# EAGLE board OLED_Adapter_ein_Display2 (EAGLE 9.5.2)
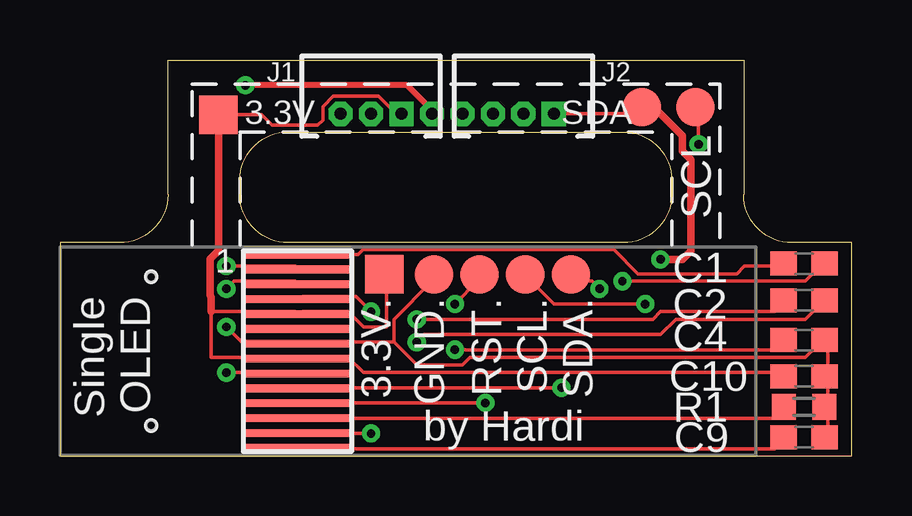
[diagram p0: board, top side]
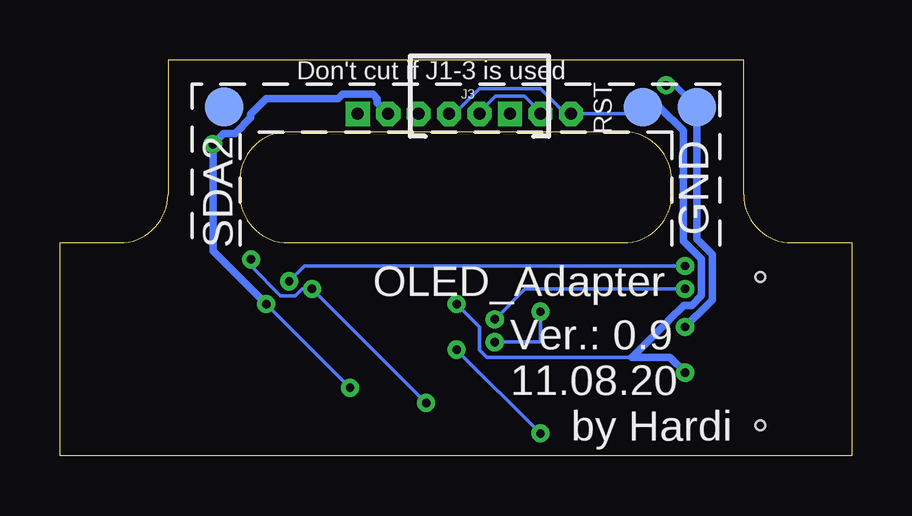
[diagram p1: board, bottom side, seen from below]

Size 33 x 16.5 mm. Coordinates in mm from the lower left corner, seen from the top.
Outline: 0,0 33,0 33,8.88 30.5,8.88 arc-90 28.5,10.88 28.5,16.5 4.5,16.5 4.5,10.88 arc-90 2.5,8.88 0,8.88 0,0
Outline: 23.5,8.88 9.5,8.88 arc-90 7.5,10.88 7.5,11.5 arc-90 9.5,13.5 23.5,13.5 arc-90 25.5,11.5 25.5,10.88 arc-90 23.5,8.88
Copper layers (1*16): Top 0.035mm / dielectric 1.5mm / Bottom 0.035mm
Design rules "default *": minimum track width 6mil, minimum drill 0.35mm, track to track 6mil, track to pad 6mil, pad to pad 6mil, via to via 6mil, smd to smd 6mil, copper to edge 8mil, drill to drill 6mil, minimum pad ring 10mil, minimum via ring 8mil, stop-mask expansion 4mil, vias tented up to drill 0mil, thermal gap 10mil

## Footprints (pad centres in the part's own frame; a part is rotated, then mirrored left to right if it is on the bottom)
TP16SQ = smd 1.6 x 1.6: TP 0,0
C0603 = smd 1.1 x 1: 1 -0.85,0; 2 0.85,0
TP16R = smd 1.6 x 1.6: TP 0,0
OLED_FLEX_W_DISP = smd 4.5 x 0.32: 1 0,0; 2 0,-0.62; 3 0,-1.24; 4 0,-1.86; 5 0,-2.48; 6 0,-3.1; 7 0,-3.72; 8 0,-4.34; 9 0,-4.96; 10 0,-5.58; 11 0,-6.2; 12 0,-6.82; 13 0,-7.44; 14 0,-8.06 | hole 0.4: -6.1,-0.93; -6.1,-7.13
MINI = drill 0.5 pad 1.016 square: 1 -1.27,0 | drill 0.5 pad 1.016 octagon: 2 0,0; 3 1.27,0
R0603 = smd 1 x 1.1: 1 -0.85,0; 2 0.85,0

## Placement (x,y rotation side)
3.3V  3.3V  [TP16SQ]  6.6,14.22 0 top
3.3V.  TPTP16SQ  [TP16SQ]  13.53,7.56 0 top
C1  470nF  [C0603]  31.02,8 180 top
C2  470nF  [C0603]  31.02,6.48 180 top
C4  2.2uF  [C0603]  31.02,4.83 180 top
C9  4.7uF  [C0603]  31.02,0.76 0 top
C10  4.7uF  [C0603]  31.02,3.3 0 top
GND  GND  [TP16R]  6.44,14.53 0 bottom
GND.  TPTP16R  [TP16R]  15.59,7.56 0 top
IC1  OLED_FLEXW_DISP  [OLED_FLEX_W_DISP]  9.91,8.38 0 top
J1  SV3  [MINI]  12.97,14.26 180 top
J2  SV3  [MINI]  19.32,14.26 180 top
J3  SV3  [MINI]  15.51,14.26 180 bottom
R1  560K  [R0603]  31.02,2.03 180 top
RST  RST  [TP16R]  8.7,14.53 0 bottom
RST.  TPTP16R  [TP16R]  17.49,7.56 0 top
SCL  SCL  [TP16R]  26.48,14.53 0 top
SCL.  TPTP16R  [TP16R]  19.4,7.56 0 top
SDA  SDA  [TP16R]  24.26,14.53 0 top
SDA2  SDA2  [TP16R]  26.16,14.54 0 bottom
SDA.  TPTP16R  [TP16R]  21.3,7.56 0 top

## Library data of the parts
3.3V 3.3V. GND GND. RST RST. SCL SCL. SDA SDA2 SDA. = testpad
C1 C2 C4 C9 C10 = resistor
IC1 = OLED_Flex
J1-J3 = SparkFun-Connectors
R1 = rcl; SPICEPREFIX: R

## Nets
3.3V: 3.3V..TP 3.3V.TP C10.1 IC1.5 IC1.8 J1.1 J3.1
GND: C4.1 C9.2 C10.2 GND..TP GND.TP IC1.7 J1.2 J3.2 R1.1
N$1: IC1.12 R1.2
N$3: C1.2 IC1.1
N$4: C1.1 IC1.2
N$5: C2.2 IC1.3
N$6: C2.1 IC1.4
N$7: C9.1 IC1.14
N$8: C4.2 IC1.13
RES#: IC1.9 J1.3 J3.3 RST..TP RST.TP
SCL: IC1.10 J2.2 SCL..TP SCL.TP
SDA: IC1.11 J2.1 SDA..TP SDA.TP

## Tracks (layer width: path | path; a pad name or v marks a point on that pad's centre or on a via)
3.3V
  Top 0.152: 6.62,14.26 3.3V.TP 8.41,14.22 8.84,13.78 10.75,13.78 10.96,13.99 10.96,14.56 11.39,14.99 13.28,14.99 14.01,14.26 J3.1 | 3.3V..TP 13.61,7.27 13.61,5.37 12.65,5.37 12.02,6 10.11,6 IC1.5 9.79,6 6.3,6 6.3,4.1 9.79,4.1 IC1.8 10.11,4.1 12.02,4.1 12.65,3.46 30.11,3.46 C10.1
  Top 0.305: 6.3,6 6.3,6.62 6.25,6.67 6.25,8.19 6.62,8.55 6.62,14.26
GND  (via drill 0.35)
  Top 0.152: C9.2 32.02,0.92 32.02,1.87 R1.1 32.02,2.19 32.02,3.14 C10.2 32.02,3.46 32.02,4.73 C4.1 31.7,4.73 31.07,4.1 17.1,4.1 16.78,3.78 14.88,3.78 13.92,4.73 | 13.92,4.73 13.92,5.68 15.51,7.27 GND..TP | 13.92,4.73 10.11,4.73 IC1.7 9.79,4.73 7.57,4.73 v6.94,5.37
  Top 0.254: v7.73,15.44 14.46,15.44 15.51,14.4 J3.2
  Bottom 0.152: J3.2 15.51,14.32 14.84,14.99 13.64,14.99 12.97,14.32 J1.2
  Bottom 0.254: GND.TP 7.35,15.44 v7.73,15.44
  Bottom 0.305: v6.94,5.37 6.49,5.81 6.46,5.81 5.8,6.48 5.8,8.38 6.45,9.03 GND.TP
N$1
  Top 0.152: R1.2 30.11,1.87 29.8,1.56 10.11,1.56 IC1.12
N$3
  Top 0.152: IC1.1 12.34,8.38 | 12.34,8.38 12.43,8.38 12.63,8.59 23.09,8.59 24.09,7.58 28.21,7.58 28.54,7.91 30.07,7.91 C1.2 | 12.34,8.38
N$4  (via drill 0.35)
  Top 0.152: v23.45,7.27 31.07,7.27 31.7,7.91 C1.1 | v6.94,7.91 9.79,7.91 IC1.2
  Bottom 0.152: v23.45,7.27 22.81,7.91 v6.94,7.91
N$5  (via drill 0.35)
  Top 0.152: v14.88,5.68 24.72,5.68 25.04,6 29.8,6 30.11,6.32 C2.2 | v6.94,6.95 7.26,7.27 9.79,7.27 IC1.3
  Bottom 0.152: v14.88,5.68 13.61,6.95 v6.94,6.95
N$6  (via drill 0.35)
  Top 0.152: v14.88,4.73 15.19,5.05 25.04,5.05 25.67,5.68 31.07,5.68 31.7,6.32 C2.1 | v12.97,6 12.34,6.64 10.11,6.64 IC1.4
  Bottom 0.152: v14.88,4.73 12.97,4.73 v12.97,6
N$7
  Top 0.152: C9.1 30.11,0.6 29.8,0.29 10.11,0.29 IC1.14
N$8  (via drill 0.35)
  Top 0.152: v16.46,4.41 29.8,4.41 30.11,4.73 C4.2 | v12.97,0.92 10.11,0.92 IC1.13
  Bottom 0.152: v12.97,0.92 v16.46,4.41
RES#  (via drill 0.35)
  Top 0.152: v16.46,6.32 17.41,7.27 RST..TP | v6.94,3.46 9.79,3.46 IC1.9
  Bottom 0.152: v16.46,6.32 15.51,5.37 15.51,4.41 15.19,4.1 9.16,4.1 | RST.TP 8.84,14.26 J1.3 11.93,14.26 12.97,15.3 15.51,15.3 16.55,14.26 J3.3
  Bottom 0.305: RST.TP 8.01,14.53 7.02,13.54 7.02,8.95 6.25,8.19 6.25,6.67 6.66,6.27 7,6.27 7.62,5.65 7.62,5.64 9.16,4.1 7.57,4.1 v6.94,3.46
SCL  (via drill 0.35)
  Top 0.152: v24.4,6.32 20.59,6.32 19.64,7.27 SCL..TP | v26.62,12.99 26.62,14.26 SCL.TP | v20.91,2.83 10.11,2.83 IC1.10
  Bottom 0.152: v24.4,6.32 v20.91,2.83
  Bottom 0.305: J2.2 19.78,14.71 19.78,14.89 19.96,15.07 21.22,15.07 21.4,14.89 24.4,14.89 25.06,14.23 25.06,14.08 25.7,13.44 26.17,13.44 v26.62,12.99 26.62,8.54 v24.4,6.32
SDA  (via drill 0.35)
  Top 0.152: J2.1 24.08,14.26 SDA.TP | v17.73,2.19 10.11,2.19 IC1.11 | v22.5,6.95 22.18,7.27 21.54,7.27 SDA..TP
  Top 0.305: SDA.TP 24.76,14.53 25.94,13.35 25.94,12.7 26.3,12.34 26.3,8.54 25.95,8.18 v25.04,8.18
  Bottom 0.152: v17.73,2.19 v22.5,6.95 22.91,6.95 23.2,6.66 23.79,6.66 25.04,7.91 v25.04,8.18

## Text on the board
tPlace: Single / OLED | by Hardi
bPlace: Don't cut if J1-3 is used | OLED_Adapter | Ver.: 0.9 | 11.08.20 | by Hardi